# Altium PCB DIOT_SYS_extender_card.PcbDoc (part 6 of 6)
Units mm, origin at the board's own origin, x right, y up, seen from the top; angles counter-clockwise.
Board outline 280.04 x 100 mm, 6 copper layers (Top Layer, L2GND, L3, L4, L5GND, Bottom Layer), stack 1.558 mm thick; 18 components, 344 nets, 1062 pads, 179 vias.
Unrouted connection lines stored in the file: 389.
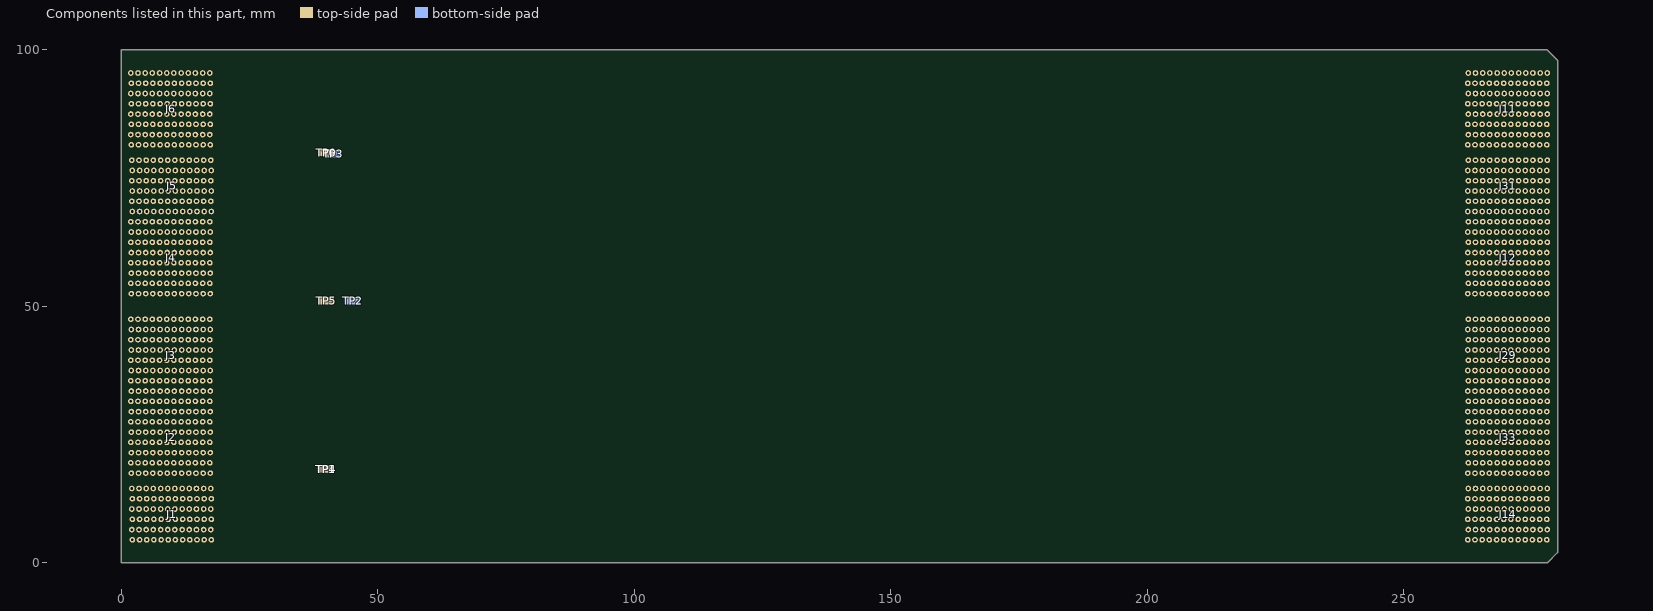
[diagram p10: the components of this part, seen from the top]

## Silkscreen, mask and mechanical layers (free items; w line width, h text height) (continued)
Bottom Overlay:
  drawing of 7 lines, arcs and shapes, not listed
  text "System Board | Peripheral" at 55.22,97.983 h1
  text "P" at 27.829,97.379 h0.6
  text "P" at 42.503,96.43 h0.6
  text "S8L11" at 31.231,96.279 h0.7
  text "N" at 27.829,95.294 h0.6
  text "S8L14" at 46.35,95.301 h0.7
  text "P" at 32.841,95.279 h0.6
  text "N" at 42.503,94.345 h0.6
  text "S7L11" at 36.159,94.269 h0.7
  text "P" at 47.503,94.196 h0.6
  text "S7L14" at 51.297,93.216 h0.7
  text "N" at 32.841,93.194 h0.6
  text "P" at 37.705,93.179 h0.6
  text "S6L11" at 40.903,92.146 h0.7
  text "N" at 47.503,92.112 h0.6
  text "P" at 27.864,91.255 h0.6
  text "S6L14" at 56.378,91.159 h0.7
  text "N" at 37.705,91.094 h0.6
  text "Vext supplies are not supported in this extension board! / Do not use them for supply Peripheral Board!" at 105.248,90.921 h0.7
  text "P" at 42.632,90.308 h0.6
  text "S5L11" at 31.263,90.2 h0.7
  text "P" at 32.859,89.235 h0.6
  text "S5L14" at 46.367,89.19 h0.7
  text "N" at 27.864,89.171 h0.6
  text "P" at 47.637,88.336 h0.6
  text "N" at 42.632,88.224 h0.6
  text "S4L11" at 36.239,88.147 h0.7
  text "P" at 37.849,87.298 h0.6
  text "S4L14" at 51.427,87.206 h0.7
  text "N" at 32.859,87.151 h0.6
  text "P" at 52.59,86.371 h0.6
  text "N" at 47.637,86.252 h0.6
  text "Left descriptions are for System Board / Right descriptions are for Pherpheral Board" at 105.289,86.254 h0.7
  text "S3L11" at 41.257,86.215 h0.7
  text "S3L14" at 56.397,85.264 h0.7
  text "P" at 27.86,85.215 h0.6
  text "N" at 37.849,85.213 h0.6
  text "P" at 42.623,84.297 h0.6
  text "N" at 52.59,84.287 h0.6
  text "S2L11" at 31.31,84.153 h0.7
  text "P" at 47.62,83.424 h0.6
  text "P" at 32.841,83.282 h0.6
  text "S2L14" at 46.056,83.28 h0.7
  text "N" at 27.86,83.13 h0.6
  text "S1L14" at 51.419,82.375 h0.7
  text "L13" at 46.938,82.256 h0.7
  text "N" at 42.623,82.213 h0.6
  text "S1L11" at 35.993,82.188 h0.7
  text "L12" at 31.907,82.114 h0.7
  text "N" at 47.62,81.339 h0.6
  text "N" at 32.841,81.198 h0.6
  text "P" at 27.863,81.144 h0.6
  text "SERV5" at 56.583,80.821 h0.7
  text "GND" at 42.161,80.745 h0.7
  text "P" at 47.649,80.403 h0.6
  text "CLK5" at 30.849,80.103 h0.7
  text "CLK8" at 51.031,79.334 h0.7
  text "N" at 27.863,79.06 h0.6
  text "SERV6" at 36.645,78.556 h0.7
  text "N" at 47.649,78.319 h0.6
  text "P" at 52.673,78.23 h0.6
  text "P" at 37.855,78.059 h0.6
  text "SERV8" at 36.645,77.489 h0.7
  text "CLK4" at 55.81,77.09 h0.7
  text "CLK1" at 40.48,77 h0.7
  text "SERV1" at 31.312,76.777 h0.7
  text "P" at 32.975,76.303 h0.6
  text "N" at 52.673,76.145 h0.6
  text "N" at 37.855,75.975 h0.6
  text "SERV3" at 46.318,75.858 h0.7
  text "SERV4" at 31.312,75.763 h0.7
  text "S8L7" at 35.876,75.265 h0.7
  text "P" at 47.643,75.246 h0.6
  text "P" at 37.899,74.249 h0.6
  text "S8L10" at 51.417,74.228 h0.7
  text "N" at 32.975,74.218 h0.6
  text "P" at 52.691,73.311 h0.6
  text "M8Rx" at 40.81,73.194 h0.7
  text "N" at 47.643,73.162 h0.6
  text "P" at 27.854,72.219 h0.6
  text "S8L6" at 56.025,72.222 h0.7
  text "N" at 37.899,72.164 h0.6
  text "P" at 42.68,71.317 h0.6
  text "N" at 52.691,71.227 h0.6
  text "S7L8" at 30.822,71.148 h0.7
  text "P" at 32.847,70.247 h0.6
  text "S7L10" at 46.232,70.237 h0.7
  text "N" at 27.854,70.135 h0.6
  text "P" at 47.603,69.408 h0.6
  text "N" at 42.68,69.232 h0.6
  text "M7Rx" at 35.853,69.201 h0.7
  text "S7L6" at 50.923,68.353 h0.7
  text "P" at 37.847,68.227 h0.6
  text "N" at 32.847,68.163 h0.6
  text "IO42" at 37.043,67.666 h0.7
  text "N" at 47.603,67.324 h0.6
  text "P" at 52.674,67.326 h0.6
  text "S6L8" at 40.79,67.118 h0.7
  text "IO46" at 51.847,66.814 h0.7
  text "IO43" at 37.043,66.518 h0.7
  text "P" at 27.847,66.261 h0.6
  text "S6L10" at 56.458,66.247 h0.7
  text "N" at 37.847,66.143 h0.6
  text "IO32" at 27.143,65.741 h0.7
  text "IO47" at 51.847,65.667 h0.7
  text "P" at 42.659,65.374 h0.6
  text "N" at 52.674,65.241 h0.6
  text "M6Rx" at 30.759,65.196 h0.7
  text "IO38" at 41.915,64.751 h0.7
  text "IO33" at 27.143,64.594 h0.7
  text "P" at 32.826,64.266 h0.6
  text "S6L6" at 45.989,64.254 h0.7
  text "N" at 27.847,64.177 h0.6
  text "IO26" at 32.167,63.723 h0.7
  text "IO39" at 41.915,63.604 h0.7
  text "P" at 47.615,63.325 h0.6
  text "N" at 42.659,63.29 h0.6
  text "S5L8" at 35.747,63.173 h0.7
  text "IO30" at 46.926,62.71 h0.7
  text "IO27" at 32.167,62.576 h0.7
  text "P" at 37.85,62.235 h0.6
  text "S5L10" at 51.387,62.228 h0.7
  text "N" at 32.826,62.182 h0.6
  text "IO18" at 37.081,61.752 h0.7
  text "IO31" at 46.926,61.563 h0.7
  text "P" at 52.586,61.448 h0.6
  text "N" at 47.615,61.24 h0.6
  text "M5Rx" at 40.773,61.179 h0.7
  text "IO22" at 51.756,60.963 h0.7
  text "IO19" at 37.081,60.605 h0.7
  text "S5L6" at 56.318,60.347 h0.7
  text "P" at 27.863,60.246 h0.6
  text "N" at 37.85,60.15 h0.6
  text "IO23" at 51.756,59.816 h0.7
  text "IO8" at 27.043,59.706 h0.7
  text "P" at 42.701,59.391 h0.6
  text "N" at 52.586,59.363 h0.6
  text "S4L7" at 30.7,59.145 h0.7
  text "IO14" at 41.948,58.829 h0.7
  text "IO9" at 27.043,58.559 h0.7
  text "S4L10" at 46.293,58.262 h0.7
  text "P" at 32.903,58.234 h0.6
  text "N" at 27.863,58.162 h0.6
  text "IO15" at 41.948,57.682 h0.7
  text "N" at 42.701,57.306 h0.6
  text "P" at 47.616,57.303 h0.6
  text "M4Rx" at 35.731,57.169 h0.7
  text "IO6" at 46.581,56.839 h0.7
  text "S4L6" at 50.958,56.22 h0.7
  text "P" at 37.855,56.184 h0.6
  text "N" at 32.903,56.15 h0.6
  text "IO7" at 46.581,55.692 h0.7
  text "sBUS2" at 36.995,55.63 h0.7
  text "P" at 52.702,55.38 h0.6
  text "N" at 47.616,55.219 h0.6
  text "S3L8" at 40.691,55.099 h0.7
  text "sBUS6" at 51.94,54.893 h0.7
  text "sBUS3" at 36.995,54.627 h0.7
  text "P" at 27.847,54.298 h0.6
  text "P" at 42.671,54.27 h0.6
  text "S3L10" at 56.449,54.258 h0.7
  text "N" at 37.855,54.099 h0.6
  text "sBUS7" at 51.94,53.89 h0.7
  text "N" at 52.702,53.296 h0.6
  text "Vaux2" at 41.924,53.248 h0.7
  text "Vaux1" at 27.068,53.214 h0.7
  text "M3Rx" at 30.768,53.185 h0.7
  text "S3L6" at 45.936,53.155 h0.7
  text "N" at 27.847,52.214 h0.6
  text "N" at 42.671,52.185 h0.6
  text "GND" at 43.35,50.85 h0.7
  text "P" at 47.675,49.894 h0.6
  text "I0102" at 46.813,49.212 h0.7
  text "S8L4" at 50.855,48.807 h0.7
  text "P" at 52.584,48.352 h0.6
  text "IO103" at 46.813,48.166 h0.7
  text "N" at 47.675,47.81 h0.6
  text "IO94" at 51.806,47.767 h0.7
  text "S6L4" at 55.897,47.297 h0.7
  text "N" at 32.827,47.243 h0.6
  text "IO97" at 32.084,46.733 h0.7
  text "IO95" at 51.806,46.721 h0.7
  text "N" at 52.584,46.267 h0.6
  text "P" at 42.612,46.192 h0.6
  text "S7L3" at 35.857,46.168 h0.7
  text "IO86" at 41.846,45.982 h0.7
  text "IO96" at 32.084,45.686 h0.7
  text "N" at 37.868,45.198 h0.6
  text "P" at 32.827,45.182 h0.6
  text "S4L4" at 45.947,45.117 h0.7
  text "IO87" at 41.846,44.936 h0.7
  text "IO89" at 37.14,44.655 h0.7
  text "P" at 47.603,44.179 h0.6
  text "N" at 42.612,44.107 h0.6
  text "S5L3" at 40.829,44 h0.7
  text "IO78" at 46.776,43.704 h0.7
  text "IO88" at 37.14,43.609 h0.7
  text "N" at 27.847,43.199 h0.6
  text "S2L4" at 50.842,43.168 h0.7
  text "P" at 37.868,43.137 h0.6
  text "IO81" at 27.023,42.682 h0.7
  text "IO79" at 46.776,42.658 h0.7
  text "P" at 52.642,42.199 h0.6
  text "S3L3" at 30.764,42.164 h0.7
  text "N" at 47.603,42.094 h0.6
  text "IO70" at 51.896,41.667 h0.7
  text "IO80" at 27.023,41.636 h0.7
  text "N" at 32.865,41.204 h0.6
  text "S7L1" at 55.688,41.182 h0.7
  text "P" at 27.847,41.139 h0.6
  text "IO73" at 32.142,40.694 h0.7
  text "IO71" at 51.896,40.621 h0.7
  text "P" at 42.671,40.206 h0.6
  text "S8L0" at 35.736,40.158 h0.7
  text "N" at 52.642,40.114 h0.6
  text "IO62" at 41.879,40.049 h0.7
  text "IO72" at 32.142,39.648 h0.7
  text "N" at 37.875,39.209 h0.6
  text "P" at 32.865,39.144 h0.6
  text "S5L1" at 45.696,39.064 h0.7
  text "IO63" at 41.879,39.003 h0.7
  text "Distributed I/O Tier  / System Board and Peripheral / Extender Card" at 178.8,39 h1.5
  text "IO65" at 37.162,38.635 h0.7
  text "P" at 47.622,38.133 h0.6
  text "N" at 42.671,38.122 h0.6
  text "S6L0" at 40.692,38.062 h0.7
  text "IO64" at 37.162,37.589 h0.7
  text "IO54" at 46.895,37.596 h0.7
  text "N" at 27.847,37.21 h0.6
  text "P" at 37.875,37.149 h0.6
  text "S3L1" at 50.536,37.072 h0.7
  text "IO57" at 27.054,36.68 h0.7
  text "IO55" at 46.895,36.55 h0.7
  text "P" at 52.648,36.289 h0.6
  text "S4L0" at 30.833,36.153 h0.7
  text "N" at 47.622,36.048 h0.6
  text "IO56" at 27.054,35.634 h0.7
  text "N" at 32.84,35.229 h0.6
  text "Vext4" at 51.889,35.208 h0.7
  text "S8L2" at 55.833,35.186 h0.7
  text "P" at 27.847,35.149 h0.6
  text "IO49" at 32.172,34.704 h0.7
  text "Licensed under CERN-OHL-W v2 or later" at 177.9,34.5 h1.5
  text "N" at 52.648,34.205 h0.6
  text "S2L0" at 35.863,34.192 h0.7
  text "P" at 42.703,34.079 h0.6
  text "IO48" at 32.172,33.658 h0.7
  text "N" at 37.875,33.217 h0.6
  text "P" at 32.84,33.169 h0.6
  text "S4L2" at 45.784,33.082 h0.7
  text "Vext3" at 37.09,32.19 h0.7
  text "S5L2" at 40.762,32.165 h0.7
  text "N" at 42.703,31.994 h0.6
  text "F_IO1" at 51.195,31.312 h0.7
  text "P" at 37.875,31.157 h0.6
  text "P_IO1" at 31.28,30.916 h0.7
  text "P_IO0" at 56.41,29.994 h0.7
  text "P_IO2" at 31.28,29.701 h0.7
  text "P" at 32.863,29.257 h0.6
  text "F_IO0" at 56.41,28.853 h0.7
  text "P" at 42.629,28.332 h0.6
  text "S5L15" at 36.346,28.18 h0.7
  text "P" at 37.861,27.24 h0.6
  text "S8L15" at 46.458,27.221 h0.7
  text "N" at 32.863,27.173 h0.6
  text "P" at 47.598,26.321 h0.6
  text "N" at 42.629,26.247 h0.6
  text "S1L15" at 41.23,26.159 h0.7
  text "P" at 27.85,25.247 h0.6
  text "S4L15" at 51.426,25.209 h0.7
  text "N" at 37.861,25.156 h0.6
  text "P" at 52.585,24.349 h0.6
  text "N" at 47.598,24.237 h0.6
  text "S2L7" at 30.73,24.173 h0.7
  text "P" at 32.859,23.239 h0.6
  text "S2L10" at 56.346,23.237 h0.7
  text "N" at 27.85,23.162 h0.6
  text "P" at 42.65,22.358 h0.6
  text "N" at 52.585,22.265 h0.6
  text "M2Rx" at 35.75,22.201 h0.7
  text "2023 / v1.0" at 136.6,22 h3
  text "S2L6" at 45.833,21.307 h0.7
  text "N" at 37.853,21.235 h0.6
  text "N" at 32.859,21.155 h0.6
  text "N" at 42.65,20.274 h0.6
  text "M2Tx" at 40.765,20.157 h0.7
  text "P" at 47.626,19.65 h0.6
  text "P" at 37.853,19.175 h0.6
  text "S1L10" at 51.298,18.625 h0.7
  text "L9" at 46.875,18.584 h0.7
  text "N" at 47.626,17.566 h0.6
  text "P" at 52.706,17.559 h0.6
  text "GND" at 40.93,16.674 h0.7
  text "L5" at 51.773,16.519 h0.7
  text "S1L6" at 55.762,16.49 h0.7
  text "P" at 27.899,16.405 h0.6
  text "N" at 52.706,15.474 h0.6
  text "L8" at 26.979,15.381 h0.7
  text "S1L7" at 30.711,15.291 h0.7
  text "P" at 42.706,15.229 h0.6
  text "N" at 27.899,14.32 h0.6
  text "P" at 32.877,14.247 h0.6
  text "L3" at 41.917,14.157 h0.7
  text "S1L4" at 45.639,14.172 h0.7
  text "Rx" at 32.032,13.223 h0.7
  text "M1Rx" at 35.589,13.227 h0.7
  text "N" at 42.706,13.144 h0.6
  text "GA0" at 46.535,12.718 h0.7
  text "PWRBTNn" at 53.886,12.663 h0.7
  text "N" at 32.877,12.163 h0.6
  text "N" at 37.853,12.169 h0.6
  text "PWR_FAILn" at 53.886,11.767 h0.7
  text "GA1" at 46.535,11.718 h0.7
  text "S1L5" at 40.63,11.145 h0.7
  text "L6" at 36.948,11.088 h0.7
  text "GA2" at 51.435,10.304 h0.7
  text "P" at 27.866,10.278 h0.6
  text "GND" at 55.327,10.154 h0.7
  text "P" at 37.853,10.109 h0.6
  text "sBUS4" at 41.891,9.596 h0.7
  text "sBUS4" at 46.218,9.457 h0.7
  text "GA3" at 51.426,9.298 h0.7
  text "S1L0" at 30.609,9.207 h0.7
  text "L1" at 26.982,9.171 h0.7
  text "GND" at 55.33,9.148 h0.7
  text "sBUS2" at 41.881,8.606 h0.7
  text "sBUS2" at 46.208,8.467 h0.7
  text "N" at 27.866,8.194 h0.6
  text "C_SCL" at 32.02,7.797 h0.7
  text "C_SCL" at 36.42,7.797 h0.7
  text "C_SDA" at 32.02,6.717 h0.7
  text "C_SDA" at 36.42,6.717 h0.7
  text "SYSENn" at 51.894,6.229 h0.7
  text "P12V0" at 26.875,4.668 h0.7
  text "P12V0" at 31.334,4.668 h0.7
  text ".Layer_Name" at 182.1,-50.1 h1.91
Top Paste:
  text ".Layer_Name" at 137.8,-53.1 h1.91
Bottom Paste:
  text ".Layer_Name" at 178.2,-53.1 h1.91
Top Solder:
  rectangle: 60.623,0.603 279.419,2.4
  region: 266.037,51.755 266.037,48.255 280,48.255 280,51.755
  text ".Layer_Name" at 141.45,-56.2 h1.91
Bottom Solder:
  rectangle: 60.623,0.603 279.419,2.4
  region: 266.037,51.755 266.037,48.255 280,48.255 280,51.755
  text ".Layer_Name" at 174.35,-56.2 h1.91
Board outline:
  lines w0.3: 50.84,100 51.563,100
  lines w1.27: 0,0 0,100 278.039,100 280.039,98 280.039,2 278.039,0 0,0
Board information:
  lines w0.381: 302.773,34.66 313.184,34.66 336.8,34.66 358.638,34.66 375.144,34.66 389.618,34.66 401.554,34.66 ; 302.773,37.708 313.184,37.708 336.8,37.708 358.638,37.708 375.144,37.708 389.618,37.708 401.554,37.708 ; 302.773,40.756 313.184,40.756 336.8,40.756 358.638,40.756 375.144,40.756 389.618,40.756 401.554,40.756 ; 302.773,43.804 313.184,43.804 336.8,43.804 358.638,43.804 375.144,43.804 389.618,43.804 401.554,43.804 ; 302.773,46.852 313.184,46.852 336.8,46.852 358.638,46.852 375.144,46.852 389.618,46.852 401.554,46.852 ; 302.773,49.9 313.184,49.9 336.8,49.9 358.638,49.9 375.144,49.9 389.618,49.9 401.554,49.9 ; 302.773,52.948 313.184,52.948 336.8,52.948 358.638,52.948 375.144,52.948 389.618,52.948 401.554,52.948 ; 302.773,55.996 313.184,55.996 336.8,55.996 358.638,55.996 375.144,55.996 389.618,55.996 401.554,55.996 ; 302.773,59.044 313.184,59.044 336.8,59.044 358.638,59.044 375.144,59.044 389.618,59.044 401.554,59.044 ; 302.773,62.092 313.184,62.092 336.8,62.092 358.638,62.092 375.144,62.092 389.618,62.092 401.554,62.092 ; 302.773,65.14 313.184,65.14 336.8,65.14 358.638,65.14 375.144,65.14 389.618,65.14 401.554,65.14 ; 302.773,68.188 313.184,68.188 336.8,68.188 358.638,68.188 375.144,68.188 389.618,68.188 401.554,68.188 ; 302.773,71.236 313.184,71.236 336.8,71.236 358.638,71.236 375.144,71.236 389.618,71.236 401.554,71.236 ; 302.773,74.284 313.184,74.284 336.8,74.284 358.638,74.284 375.144,74.284 389.618,74.284 401.554,74.284 ; 302.773,77.332 401.554,77.332 ; 313.184,80.38 313.184,31.612 ; 336.8,80.38 336.8,31.612 ; 358.638,80.38 358.638,31.612 ; 375.144,80.38 375.144,31.612 ; 389.618,80.38 389.618,31.612 ; 313.184,31.612 302.773,31.612 302.773,80.38 401.554,80.38 401.554,31.612 389.618,31.612 ; 313.184,31.612 336.8,31.612 ; 336.8,31.612 358.638,31.612 ; 358.638,31.612 375.144,31.612 ; 375.144,31.612 389.618,31.612
  text "Layer" at 304.551,78.094 h1.52
  text "Name" at 314.962,78.094 h1.52
  text "Material" at 338.578,78.094 h1.52
  text "Thickness" at 360.416,78.094 h1.52
  text "Constant" at 376.922,78.094 h1.52
  text "Gerber" at 391.396,78.094 h1.52
  text "Top Overlay" at 314.962,75.046 h1.52
  text "GTO" at 391.396,75.046 h1.52
  text "Top Solder" at 314.962,71.998 h1.52
  text "Solder Resist" at 338.578,71.998 h1.52
  text "0,013mm" at 360.416,71.998 h1.52
  text "3.5" at 376.922,71.998 h1.52
  text "GTS" at 391.396,71.998 h1.52
  text "1" at 304.551,68.95 h1.52
  text "Top Layer" at 314.962,68.95 h1.52
  text "0,035mm" at 360.416,68.95 h1.52
  text "GTL" at 391.396,68.95 h1.52
  text "Dielectric1" at 314.962,65.902 h1.52
  text "FR-4" at 338.578,65.902 h1.52
  text "0,110mm" at 360.416,65.902 h1.52
  text "4.3" at 376.922,65.902 h1.52
  text "2" at 304.551,62.854 h1.52
  text "L2GND" at 314.962,62.854 h1.52
  text "0,017mm" at 360.416,62.854 h1.52
  text "GP1" at 391.396,62.854 h1.52
  text "Dielectric 2" at 314.962,59.806 h1.52
  text "FR-4" at 338.578,59.806 h1.52
  text "0,150mm" at 360.416,59.806 h1.52
  text "4.3" at 376.922,59.806 h1.52
  text "3" at 304.551,56.758 h1.52
  text "L3" at 314.962,56.758 h1.52
  text "0,017mm" at 360.416,56.758 h1.52
  text "G1" at 391.396,56.758 h1.52
  text "Dielectric 6" at 314.962,53.71 h1.52
  text "FR-4" at 338.578,53.71 h1.52
  text "0,900mm" at 360.416,53.71 h1.52
  text "4.3" at 376.922,53.71 h1.52
  text "4" at 304.551,50.662 h1.52
  text "L4" at 314.962,50.662 h1.52
  text "0,017mm" at 360.416,50.662 h1.52
  text "G2" at 391.396,50.662 h1.52
  text "Dielectric 10" at 314.962,47.614 h1.52
  text "FR-4" at 338.578,47.614 h1.52
  text "0,150mm" at 360.416,47.614 h1.52
  text "4.3" at 376.922,47.614 h1.52
  text "5" at 304.551,44.566 h1.52
  text "L5GND" at 314.962,44.566 h1.52
  text "0,017mm" at 360.416,44.566 h1.52
  text "GP2" at 391.396,44.566 h1.52
  text "Dielectric 11" at 314.962,41.518 h1.52
  text "FR-4" at 338.578,41.518 h1.52
  text "0,110mm" at 360.416,41.518 h1.52
  text "4.3" at 376.922,41.518 h1.52
  text "6" at 304.551,38.47 h1.52
  text "Bottom Layer" at 314.962,38.47 h1.52
  text "0,035mm" at 360.416,38.47 h1.52
  text "GBL" at 391.396,38.47 h1.52
  text "Bottom Solder" at 314.962,35.422 h1.52
  text "Solder Resist" at 338.578,35.422 h1.52
  text "0,013mm" at 360.416,35.422 h1.52
  text "3.5" at 376.922,35.422 h1.52
  text "GBS" at 391.396,35.422 h1.52
  text "Bottom Overlay" at 314.962,32.374 h1.52
  text "GBO" at 391.396,32.374 h1.52
  text "Total board thickness:" at 304.551,29.326 h1.52
  text "1,584mm" at 360.416,29.326 h1.52
  text "- Components" at 239.9,-17.65 h3
  text ".Component_Count" at 277.6,-17.65 h3
  text "- Pins" at 239.9,-23.225 h3
  text ".Pad_Count" at 277.6,-23.225 h3
  text "- Vias" at 239.9,-28.8 h3
  text ".Via_Count" at 277.6,-28.8 h3
  text "- Holes" at 239.9,-34.375 h3
  text ".Hole_Count" at 277.6,-34.375 h3
  text "- Nets" at 239.9,-39.95 h3
  text ".Net_Count" at 277.6,-39.95 h3
Corners:
  lines w0.254: 0,105 0,100 55,100 ; 54.99,-0.015 59.99,-0.015 ; 144.575,-47.625 144.575,-42.545 ; 149.655,-47.625 149.655,-42.545 ; 154.735,-47.625 154.735,-42.545 ; 159.825,-47.625 159.825,-42.545 ; 164.905,-47.625 164.905,-42.545 ; 280.031,-5 280.031,0 285.031,0 ; 280.031,105 280.031,100 285.031,100 ; 139.495,-47.625 169.985,-47.625 169.985,-42.545 139.495,-42.545 139.495,-47.625
Title Block:
Notvisible:
  lines w0.05: 262.539,50 277.939,50
Drill Drawing:

## Dimensions
286.2,0 to 284.015,100 on Board information
0,100 to 280.031,105 on Board information

## Text inside footprints (layer, text, board x,y; h text height)
J1: Top Overlay "6" at 22.15,14.85 h1 r270; Top Overlay "5" at 22.15,12.85 h1 r270; Top Overlay "4" at 22.15,10.85 h1 r270; Top Overlay "3" at 22.15,8.85 h1 r270; Top Overlay "2" at 22.15,6.85 h1 r270; Top Overlay "1" at 22.15,4.85 h1 r270; Notvisible "Edge of Daugher Card" at -0.75,12.725 h0.5 r270; Notvisible "Top Surface of Mother Board" at -12.25,13.875 h0.5 r270; Mechanical 14 "6" at 19.65,14.85 h1 r270; Mechanical 14 "5" at 19.65,12.85 h1 r270; Mechanical 14 "4" at 19.65,10.85 h1 r270; Mechanical 14 "3" at 19.65,8.85 h1 r270; Mechanical 14 "2" at 19.65,6.85 h1 r270; Mechanical 14 "1" at 19.65,4.85 h1 r270; Mechanical 14 "L" at 17.1,16.7 h1 r270; Mechanical 14 "K" at 15.7,16.7 h1 r270; Mechanical 14 "J" at 14.3,16.7 h1 r270; Mechanical 14 "I" at 12.9,16.45 h1 r270; Mechanical 14 "H" at 11.5,16.7 h1 r270; Mechanical 14 "G" at 10.1,16.7 h1 r270; Mechanical 14 "F" at 8.7,16.7 h1 r270; Mechanical 14 "E" at 7.3,16.7 h1 r270; Mechanical 14 "D" at 5.9,16.7 h1 r270; Mechanical 14 "C" at 4.5,16.7 h1 r270; Mechanical 14 "B" at 3.1,16.7 h1 r270; Mechanical 14 "A" at 1.7,16.7 h1 r270; Drill Drawing "Diam. 0.5mm +/-0.05" at 1.45,0.5 h1; Drill Drawing "PRESS-FIT TECHNOLOGY" at 1.45,2 h1
J2: Top Overlay "8" at 22.05,31.85 h1 r270; Top Overlay "7" at 22.05,29.85 h1 r270; Top Overlay "4" at 22.05,23.85 h1 r270; Top Overlay "3" at 22.05,21.85 h1 r270; Top Overlay "2" at 22.05,19.85 h1 r270; Top Overlay "1" at 22.05,17.85 h1 r270; Top Overlay "5" at 22.05,25.85 h1 r270; Top Overlay "6" at 22.05,27.85 h1 r270; Notvisible "Edge of Daugher Card" at -0.75,27.725 h0.5 r270; Notvisible "Top Surface of Mother Board" at -12.25,28.875 h0.5 r270; Mechanical 14 "8" at 22.05,31.85 h1 r270; Mechanical 14 "7" at 22.05,29.85 h1 r270; Mechanical 14 "4" at 22.05,23.85 h1 r270; Mechanical 14 "3" at 22.05,21.85 h1 r270; Mechanical 14 "2" at 22.05,19.85 h1 r270; Mechanical 14 "1" at 22.05,17.85 h1 r270; Mechanical 14 "5" at 22.05,25.85 h1 r270; Mechanical 14 "6" at 22.05,27.85 h1 r270; Mechanical 14 "L" at 16.9,33.7 h1 r270; Mechanical 14 "K" at 15.5,33.7 h1 r270; Mechanical 14 "J" at 14.1,33.7 h1 r270; Mechanical 14 "I" at 12.7,33.45 h1 r270; Mechanical 14 "H" at 11.3,33.7 h1 r270; Mechanical 14 "G" at 9.9,33.7 h1 r270; Mechanical 14 "F" at 8.5,33.7 h1 r270; Mechanical 14 "E" at 7.1,33.7 h1 r270; Mechanical 14 "D" at 5.7,33.7 h1 r270; Mechanical 14 "C" at 4.3,33.7 h1 r270; Mechanical 14 "B" at 2.9,33.7 h1 r270; Mechanical 14 "A" at 1.5,33.7 h1 r270; Drill Drawing "Diam. 0.5mm +/-0.05" at 1.25,13.5 h1; Drill Drawing "PRESS-FIT TECHNOLOGY" at 1.25,15 h1
J3: Top Overlay "8" at 22.05,47.85 h1 r270; Top Overlay "7" at 22.05,45.85 h1 r270; Top Overlay "4" at 22.05,39.85 h1 r270; Top Overlay "3" at 22.05,37.85 h1 r270; Top Overlay "2" at 22.05,35.85 h1 r270; Top Overlay "1" at 22.05,33.85 h1 r270; Top Overlay "5" at 22.05,41.85 h1 r270; Top Overlay "6" at 22.05,43.85 h1 r270; Top Overlay "L" at 16.9,49.7 h1 r270; Top Overlay "K" at 15.5,49.7 h1 r270; Top Overlay "J" at 14.1,49.7 h1 r270; Top Overlay "I" at 12.7,49.45 h1 r270; Top Overlay "H" at 11.3,49.7 h1 r270; Top Overlay "G" at 9.9,49.7 h1 r270; Top Overlay "F" at 8.5,49.7 h1 r270; Top Overlay "E" at 7.1,49.7 h1 r270; Top Overlay "D" at 5.7,49.7 h1 r270; Top Overlay "C" at 4.3,49.7 h1 r270; Top Overlay "B" at 2.9,49.7 h1 r270; Top Overlay "A" at 1.5,49.7 h1 r270; Notvisible "Edge of Daugher Card" at -0.75,43.725 h0.5 r270; Notvisible "Top Surface of Mother Board" at -12.25,44.875 h0.5 r270; Mechanical 14 "8" at 22.05,47.85 h1 r270; Mechanical 14 "7" at 22.05,45.85 h1 r270; Mechanical 14 "4" at 22.05,39.85 h1 r270; Mechanical 14 "3" at 22.05,37.85 h1 r270; Mechanical 14 "2" at 22.05,35.85 h1 r270; Mechanical 14 "1" at 22.05,33.85 h1 r270; Mechanical 14 "5" at 22.05,41.85 h1 r270; Mechanical 14 "6" at 22.05,43.85 h1 r270; Mechanical 14 "L" at 16.9,49.7 h1 r270; Mechanical 14 "K" at 15.5,49.7 h1 r270; Mechanical 14 "J" at 14.1,49.7 h1 r270; Mechanical 14 "I" at 12.7,49.45 h1 r270; Mechanical 14 "H" at 11.3,49.7 h1 r270; Mechanical 14 "G" at 9.9,49.7 h1 r270; Mechanical 14 "F" at 8.5,49.7 h1 r270; Mechanical 14 "E" at 7.1,49.7 h1 r270; Mechanical 14 "D" at 5.7,49.7 h1 r270; Mechanical 14 "C" at 4.3,49.7 h1 r270; Mechanical 14 "B" at 2.9,49.7 h1 r270; Mechanical 14 "A" at 1.5,49.7 h1 r270; Drill Drawing "Diam. 0.5mm +/-0.05" at 1.25,29.5 h1; Drill Drawing "PRESS-FIT TECHNOLOGY" at 1.25,31 h1
J4: Top Overlay "8" at 22.05,66.85 h1 r270; Top Overlay "7" at 22.05,64.85 h1 r270; Top Overlay "4" at 22.05,58.85 h1 r270; Top Overlay "3" at 22.05,56.85 h1 r270; Top Overlay "2" at 22.05,54.85 h1 r270; Top Overlay "1" at 22.05,52.85 h1 r270; Top Overlay "5" at 22.05,60.85 h1 r270; Top Overlay "6" at 22.05,62.85 h1 r270; Notvisible "Edge of Daugher Card" at -0.75,62.725 h0.5 r270; Notvisible "Top Surface of Mother Board" at -12.25,63.875 h0.5 r270; Mechanical 14 "8" at 22.05,66.85 h1 r270; Mechanical 14 "7" at 22.05,64.85 h1 r270; Mechanical 14 "4" at 22.05,58.85 h1 r270; Mechanical 14 "3" at 22.05,56.85 h1 r270; Mechanical 14 "2" at 22.05,54.85 h1 r270; Mechanical 14 "1" at 22.05,52.85 h1 r270; Mechanical 14 "5" at 22.05,60.85 h1 r270; Mechanical 14 "6" at 22.05,62.85 h1 r270; Mechanical 14 "L" at 16.9,68.7 h1 r270; Mechanical 14 "K" at 15.5,68.7 h1 r270; Mechanical 14 "J" at 14.1,68.7 h1 r270; Mechanical 14 "I" at 12.7,68.45 h1 r270; Mechanical 14 "H" at 11.3,68.7 h1 r270; Mechanical 14 "G" at 9.9,68.7 h1 r270; Mechanical 14 "F" at 8.5,68.7 h1 r270; Mechanical 14 "E" at 7.1,68.7 h1 r270; Mechanical 14 "D" at 5.7,68.7 h1 r270; Mechanical 14 "C" at 4.3,68.7 h1 r270; Mechanical 14 "B" at 2.9,68.7 h1 r270; Mechanical 14 "A" at 1.5,68.7 h1 r270; Drill Drawing "Diam. 0.5mm +/-0.05" at 1.25,48.5 h1; Drill Drawing "PRESS-FIT TECHNOLOGY" at 1.25,50 h1
J5: Top Overlay "6" at 22.15,78.85 h1 r270; Top Overlay "5" at 22.15,76.85 h1 r270; Top Overlay "4" at 22.15,74.85 h1 r270; Top Overlay "3" at 22.15,72.85 h1 r270; Top Overlay "2" at 22.15,70.85 h1 r270; Top Overlay "1" at 22.15,68.85 h1 r270; Notvisible "Edge of Daugher Card" at -0.75,76.725 h0.5 r270; Notvisible "Top Surface of Mother Board" at -12.25,77.875 h0.5 r270; Mechanical 14 "6" at 19.65,78.85 h1 r270; Mechanical 14 "5" at 19.65,76.85 h1 r270; Mechanical 14 "4" at 19.65,74.85 h1 r270; Mechanical 14 "3" at 19.65,72.85 h1 r270; Mechanical 14 "2" at 19.65,70.85 h1 r270; Mechanical 14 "1" at 19.65,68.85 h1 r270; Mechanical 14 "L" at 17.1,80.7 h1 r270; Mechanical 14 "K" at 15.7,80.7 h1 r270; Mechanical 14 "J" at 14.3,80.7 h1 r270; Mechanical 14 "I" at 12.9,80.45 h1 r270; Mechanical 14 "H" at 11.5,80.7 h1 r270; Mechanical 14 "G" at 10.1,80.7 h1 r270; Mechanical 14 "F" at 8.7,80.7 h1 r270; Mechanical 14 "E" at 7.3,80.7 h1 r270; Mechanical 14 "D" at 5.9,80.7 h1 r270; Mechanical 14 "C" at 4.5,80.7 h1 r270; Mechanical 14 "B" at 3.1,80.7 h1 r270; Mechanical 14 "A" at 1.7,80.7 h1 r270; Drill Drawing "Diam. 0.5mm +/-0.05" at 1.45,64.5 h1; Drill Drawing "PRESS-FIT TECHNOLOGY" at 1.45,66 h1
J6: Top Overlay "A" at 1.5,97.7 h1 r270; Top Overlay "B" at 2.9,97.7 h1 r270; Top Overlay "C" at 4.3,97.7 h1 r270; Top Overlay "D" at 5.7,97.7 h1 r270; Top Overlay "E" at 7.1,97.7 h1 r270; Top Overlay "F" at 8.5,97.7 h1 r270; Top Overlay "G" at 9.9,97.7 h1 r270; Top Overlay "H" at 11.3,97.7 h1 r270; Top Overlay "I" at 12.7,97.45 h1 r270; Top Overlay "J" at 14.1,97.7 h1 r270; Top Overlay "K" at 15.5,97.7 h1 r270; Top Overlay "L" at 16.9,97.7 h1 r270; Top Overlay "6" at 22.05,91.85 h1 r270; Top Overlay "5" at 22.05,89.85 h1 r270; Top Overlay "1" at 22.05,81.85 h1 r270; Top Overlay "2" at 22.05,83.85 h1 r270; Top Overlay "3" at 22.05,85.85 h1 r270; Top Overlay "4" at 22.05,87.85 h1 r270; Top Overlay "7" at 22.05,93.85 h1 r270; Top Overlay "8" at 22.05,95.85 h1 r270; Notvisible "Top Surface of Mother Board" at -12.25,92.875 h0.5 r270; Notvisible "Edge of Daugher Card" at -0.75,91.725 h0.5 r270; Mechanical 14 "A" at 1.5,97.7 h1 r270; Mechanical 14 "B" at 2.9,97.7 h1 r270; Mechanical 14 "C" at 4.3,97.7 h1 r270; Mechanical 14 "D" at 5.7,97.7 h1 r270; Mechanical 14 "E" at 7.1,97.7 h1 r270; Mechanical 14 "F" at 8.5,97.7 h1 r270; Mechanical 14 "G" at 9.9,97.7 h1 r270; Mechanical 14 "H" at 11.3,97.7 h1 r270; Mechanical 14 "I" at 12.7,97.45 h1 r270; Mechanical 14 "J" at 14.1,97.7 h1 r270; Mechanical 14 "K" at 15.5,97.7 h1 r270; Mechanical 14 "L" at 16.9,97.7 h1 r270; Mechanical 14 "6" at 22.05,91.85 h1 r270; Mechanical 14 "5" at 22.05,89.85 h1 r270; Mechanical 14 "1" at 22.05,81.85 h1 r270; Mechanical 14 "2" at 22.05,83.85 h1 r270; Mechanical 14 "3" at 22.05,85.85 h1 r270; Mechanical 14 "4" at 22.05,87.85 h1 r270; Mechanical 14 "7" at 22.05,93.85 h1 r270; Mechanical 14 "8" at 22.05,95.85 h1 r270; Drill Drawing "PRESS-FIT TECHNOLOGY" at 1.25,79 h1; Drill Drawing "Diam. 0.5mm +/-0.05" at 1.25,77.5 h1
J11: Top Overlay "8" at 257.989,95.15 h1 r90; Top Overlay "7" at 257.989,93.15 h1 r90; Top Overlay "6" at 257.989,91.15 h1 r90; Top Overlay "5" at 257.989,89.15 h1 r90; Top Overlay "4" at 257.989,87.15 h1 r90; Top Overlay "3" at 257.989,85.15 h1 r90; Top Overlay "2" at 257.989,83.15 h1 r90; Top Overlay "1" at 257.989,81.15 h1 r90; Notvisible "Edge of Daugher Card" at 280.789,85.275 h0.5 r90; Notvisible "Top Surface of Mother Board" at 292.289,84.125 h0.5 r90; Mechanical 14 "A" at 278.439,78.3 h1 r90; Mechanical 14 "B" at 277.039,78.3 h1 r90; Mechanical 14 "C" at 275.639,78.3 h1 r90; Mechanical 14 "D" at 274.239,79.3 h1 r90; Mechanical 14 "E" at 272.839,79.3 h1 r90; Mechanical 14 "F" at 271.439,79.3 h1 r90; Mechanical 14 "8" at 257.989,95.15 h1 r90; Mechanical 14 "7" at 257.989,93.15 h1 r90; Mechanical 14 "6" at 257.989,91.15 h1 r90; Mechanical 14 "5" at 257.989,89.15 h1 r90; Mechanical 14 "G" at 270.039,79.3 h1 r90; Mechanical 14 "H" at 268.639,79.3 h1 r90; Mechanical 14 "I" at 267.239,79.55 h1 r90; Mechanical 14 "4" at 257.989,87.15 h1 r90; Mechanical 14 "3" at 257.989,85.15 h1 r90; Mechanical 14 "J" at 265.839,79.3 h1 r90; Mechanical 14 "K" at 264.439,79.3 h1 r90; Mechanical 14 "2" at 257.989,83.15 h1 r90; Mechanical 14 "L" at 263.039,79.3 h1 r90; Mechanical 14 "1" at 257.989,81.15 h1 r90; Drill Drawing "PRESS-FIT TECHNOLOGY" at 261.689,48.835 h1; Drill Drawing "Diam. 0.5mm +/-0.05" at 261.689,50.335 h1
J12: Top Overlay "1" at 257.989,52.15 h1 r90; Top Overlay "2" at 257.989,54.15 h1 r90; Top Overlay "3" at 257.989,56.15 h1 r90; Top Overlay "4" at 257.989,58.15 h1 r90; Top Overlay "5" at 257.989,60.15 h1 r90; Top Overlay "6" at 257.989,62.15 h1 r90; Top Overlay "7" at 257.989,64.15 h1 r90; Top Overlay "8" at 257.989,66.15 h1 r90; Notvisible "Top Surface of Mother Board" at 292.289,55.125 h0.5 r90; Notvisible "Edge of Daugher Card" at 280.789,56.275 h0.5 r90; Mechanical 14 "1" at 257.989,52.15 h1 r90; Mechanical 14 "L" at 263.039,50.3 h1 r90; Mechanical 14 "2" at 257.989,54.15 h1 r90; Mechanical 14 "K" at 264.439,50.3 h1 r90; Mechanical 14 "J" at 265.839,50.3 h1 r90; Mechanical 14 "3" at 257.989,56.15 h1 r90; Mechanical 14 "4" at 257.989,58.15 h1 r90; Mechanical 14 "I" at 267.239,50.55 h1 r90; Mechanical 14 "H" at 268.639,50.3 h1 r90; Mechanical 14 "G" at 270.039,50.3 h1 r90; Mechanical 14 "5" at 257.989,60.15 h1 r90; Mechanical 14 "6" at 257.989,62.15 h1 r90; Mechanical 14 "7" at 257.989,64.15 h1 r90; Mechanical 14 "8" at 257.989,66.15 h1 r90; Mechanical 14 "F" at 271.439,50.3 h1 r90; Mechanical 14 "E" at 272.839,50.3 h1 r90; Mechanical 14 "D" at 274.239,50.3 h1 r90; Mechanical 14 "C" at 275.639,50.3 h1 r90; Mechanical 14 "B" at 277.039,50.3 h1 r90; Mechanical 14 "A" at 278.439,50.3 h1 r90
J14: Top Overlay "A" at 278.439,1.3 h1 r90; Top Overlay "B" at 277.039,1.3 h1 r90; Top Overlay "C" at 275.639,1.3 h1 r90; Top Overlay "D" at 274.239,2.3 h1 r90; Top Overlay "E" at 272.839,2.3 h1 r90; Top Overlay "6" at 257.975,14.075 h1 r90; Top Overlay "5" at 257.975,11.55 h1 r90; Top Overlay "4" at 257.953,9.975 h1 r90; Top Overlay "3" at 257.989,7.9 h1 r90; Top Overlay "F" at 271.439,2.3 h1 r90; Top Overlay "G" at 270.039,2.3 h1 r90; Top Overlay "H" at 268.639,2.3 h1 r90; Top Overlay "I" at 267.239,2.55 h1 r90; Top Overlay "J" at 265.839,2.3 h1 r90; Top Overlay "K" at 264.439,2.3 h1 r90; Top Overlay "2" at 257.989,6.15 h1 r90; Top Overlay "L" at 263.039,2.3 h1 r90; Top Overlay "1" at 257.989,4.15 h1 r90; Notvisible "Top Surface of Mother Board" at 292.289,5.125 h0.5 r90; Notvisible "Edge of Daugher Card" at 280.789,6.275 h0.5 r90; Mechanical 14 "A" at 278.439,1.3 h1 r90; Mechanical 14 "B" at 277.039,1.3 h1 r90; Mechanical 14 "C" at 275.639,1.3 h1 r90; Mechanical 14 "D" at 274.239,2.3 h1 r90; Mechanical 14 "E" at 272.839,2.3 h1 r90; Mechanical 14 "6" at 257.989,14.15 h1 r90; Mechanical 14 "5" at 257.989,12.15 h1 r90; Mechanical 14 "4" at 257.989,10.15 h1 r90; Mechanical 14 "3" at 257.989,8.15 h1 r90; Mechanical 14 "F" at 271.439,2.3 h1 r90; Mechanical 14 "G" at 270.039,2.3 h1 r90; Mechanical 14 "H" at 268.639,2.3 h1 r90; Mechanical 14 "I" at 267.239,2.55 h1 r90; Mechanical 14 "J" at 265.839,2.3 h1 r90; Mechanical 14 "K" at 264.439,2.3 h1 r90; Mechanical 14 "1" at 257.989,4.15 h1 r90; Mechanical 14 "2" at 257.989,6.15 h1 r90; Mechanical 14 "L" at 263.039,2.3 h1 r90
J29: Top Overlay "1" at 257.989,33.15 h1 r90; Top Overlay "2" at 257.989,35.15 h1 r90; Top Overlay "3" at 257.989,37.15 h1 r90; Top Overlay "4" at 257.989,39.15 h1 r90; Top Overlay "5" at 257.989,41.15 h1 r90; Top Overlay "6" at 257.989,43.15 h1 r90; Top Overlay "7" at 257.989,45.15 h1 r90; Top Overlay "8" at 257.989,47.15 h1 r90; Notvisible "Top Surface of Mother Board" at 292.289,36.125 h0.5 r90; Notvisible "Edge of Daugher Card" at 280.789,37.275 h0.5 r90; Mechanical 14 "1" at 257.989,33.15 h1 r90; Mechanical 14 "L" at 263.039,31.3 h1 r90; Mechanical 14 "2" at 257.989,35.15 h1 r90; Mechanical 14 "K" at 264.439,31.3 h1 r90; Mechanical 14 "J" at 265.839,31.3 h1 r90; Mechanical 14 "3" at 257.989,37.15 h1 r90; Mechanical 14 "4" at 257.989,39.15 h1 r90; Mechanical 14 "I" at 267.239,31.55 h1 r90; Mechanical 14 "H" at 268.639,31.3 h1 r90; Mechanical 14 "G" at 270.039,31.3 h1 r90; Mechanical 14 "5" at 257.989,41.15 h1 r90; Mechanical 14 "6" at 257.989,43.15 h1 r90; Mechanical 14 "7" at 257.989,45.15 h1 r90; Mechanical 14 "8" at 257.989,47.15 h1 r90; Mechanical 14 "F" at 271.439,31.3 h1 r90; Mechanical 14 "E" at 272.839,31.3 h1 r90; Mechanical 14 "D" at 274.239,31.3 h1 r90; Mechanical 14 "C" at 275.639,31.3 h1 r90; Mechanical 14 "B" at 277.039,31.3 h1 r90; Mechanical 14 "A" at 278.439,31.3 h1 r90
J31: Top Overlay "6" at 257.989,78.15 h1 r90; Top Overlay "5" at 257.989,76.15 h1 r90; Top Overlay "4" at 257.989,74.15 h1 r90; Top Overlay "3" at 257.989,72.15 h1 r90; Top Overlay "2" at 257.989,70.15 h1 r90; Top Overlay "1" at 257.989,68.15 h1 r90; Notvisible "Top Surface of Mother Board" at 292.289,69.125 h0.5 r90; Notvisible "Edge of Daugher Card" at 280.789,70.275 h0.5 r90; Mechanical 14 "A" at 278.439,66.3 h1 r90; Mechanical 14 "C" at 275.639,66.3 h1 r90; Mechanical 14 "B" at 277.039,66.3 h1 r90; Mechanical 14 "D" at 274.239,66.3 h1 r90; Mechanical 14 "F" at 271.439,66.3 h1 r90; Mechanical 14 "E" at 272.839,66.3 h1 r90; Mechanical 14 "6" at 257.989,78.15 h1 r90; Mechanical 14 "5" at 257.989,76.15 h1 r90; Mechanical 14 "4" at 257.989,74.15 h1 r90; Mechanical 14 "G" at 270.039,66.3 h1 r90; Mechanical 14 "H" at 268.639,66.3 h1 r90; Mechanical 14 "I" at 267.239,66.55 h1 r90; Mechanical 14 "3" at 257.989,72.15 h1 r90; Mechanical 14 "K" at 264.439,66.3 h1 r90; Mechanical 14 "J" at 265.839,66.3 h1 r90; Mechanical 14 "1" at 257.989,68.15 h1 r90; Mechanical 14 "2" at 257.989,70.15 h1 r90; Mechanical 14 "L" at 263.039,66.3 h1 r90
J33: Top Overlay "1" at 257.975,17.575 h1 r90; Top Overlay "2" at 257.95,19.9 h1 r90; Top Overlay "3" at 258.025,21.375 h1 r90; Top Overlay "4" at 257.989,23.15 h1 r90; Top Overlay "5" at 257.989,25.15 h1 r90; Top Overlay "6" at 257.989,27.15 h1 r90; Top Overlay "7" at 257.989,29.15 h1 r90; Top Overlay "8" at 257.989,31.15 h1 r90; Notvisible "Top Surface of Mother Board" at 292.289,20.125 h0.5 r90; Notvisible "Edge of Daugher Card" at 280.789,21.275 h0.5 r90; Mechanical 14 "1" at 257.989,17.15 h1 r90; Mechanical 14 "L" at 263.039,15.3 h1 r90; Mechanical 14 "2" at 257.989,19.15 h1 r90; Mechanical 14 "K" at 264.439,15.3 h1 r90; Mechanical 14 "J" at 265.839,15.3 h1 r90; Mechanical 14 "3" at 257.989,21.15 h1 r90; Mechanical 14 "4" at 257.989,23.15 h1 r90; Mechanical 14 "I" at 267.239,15.55 h1 r90; Mechanical 14 "H" at 268.639,15.3 h1 r90; Mechanical 14 "G" at 270.039,15.3 h1 r90; Mechanical 14 "5" at 257.989,25.15 h1 r90; Mechanical 14 "6" at 257.989,27.15 h1 r90; Mechanical 14 "7" at 257.989,29.15 h1 r90; Mechanical 14 "8" at 257.989,31.15 h1 r90; Mechanical 14 "F" at 271.439,15.3 h1 r90; Mechanical 14 "E" at 272.839,15.3 h1 r90; Mechanical 14 "D" at 274.239,15.3 h1 r90; Mechanical 14 "C" at 275.639,15.3 h1 r90; Mechanical 14 "B" at 277.039,15.3 h1 r90; Mechanical 14 "A" at 278.439,15.3 h1 r90